# Altium PCB PCB_TRANSCIEVER.PcbDoc (part 2 of 2)
Units mm, origin at the board's own origin, x right, y up, seen from the top; angles counter-clockwise.
Board outline 68.83 x 64.26 mm, 4 copper layers (TOP, GND, 3v3, BOT), stack 1.554 mm thick; 95 components, 64 nets, 336 pads, 537 vias.
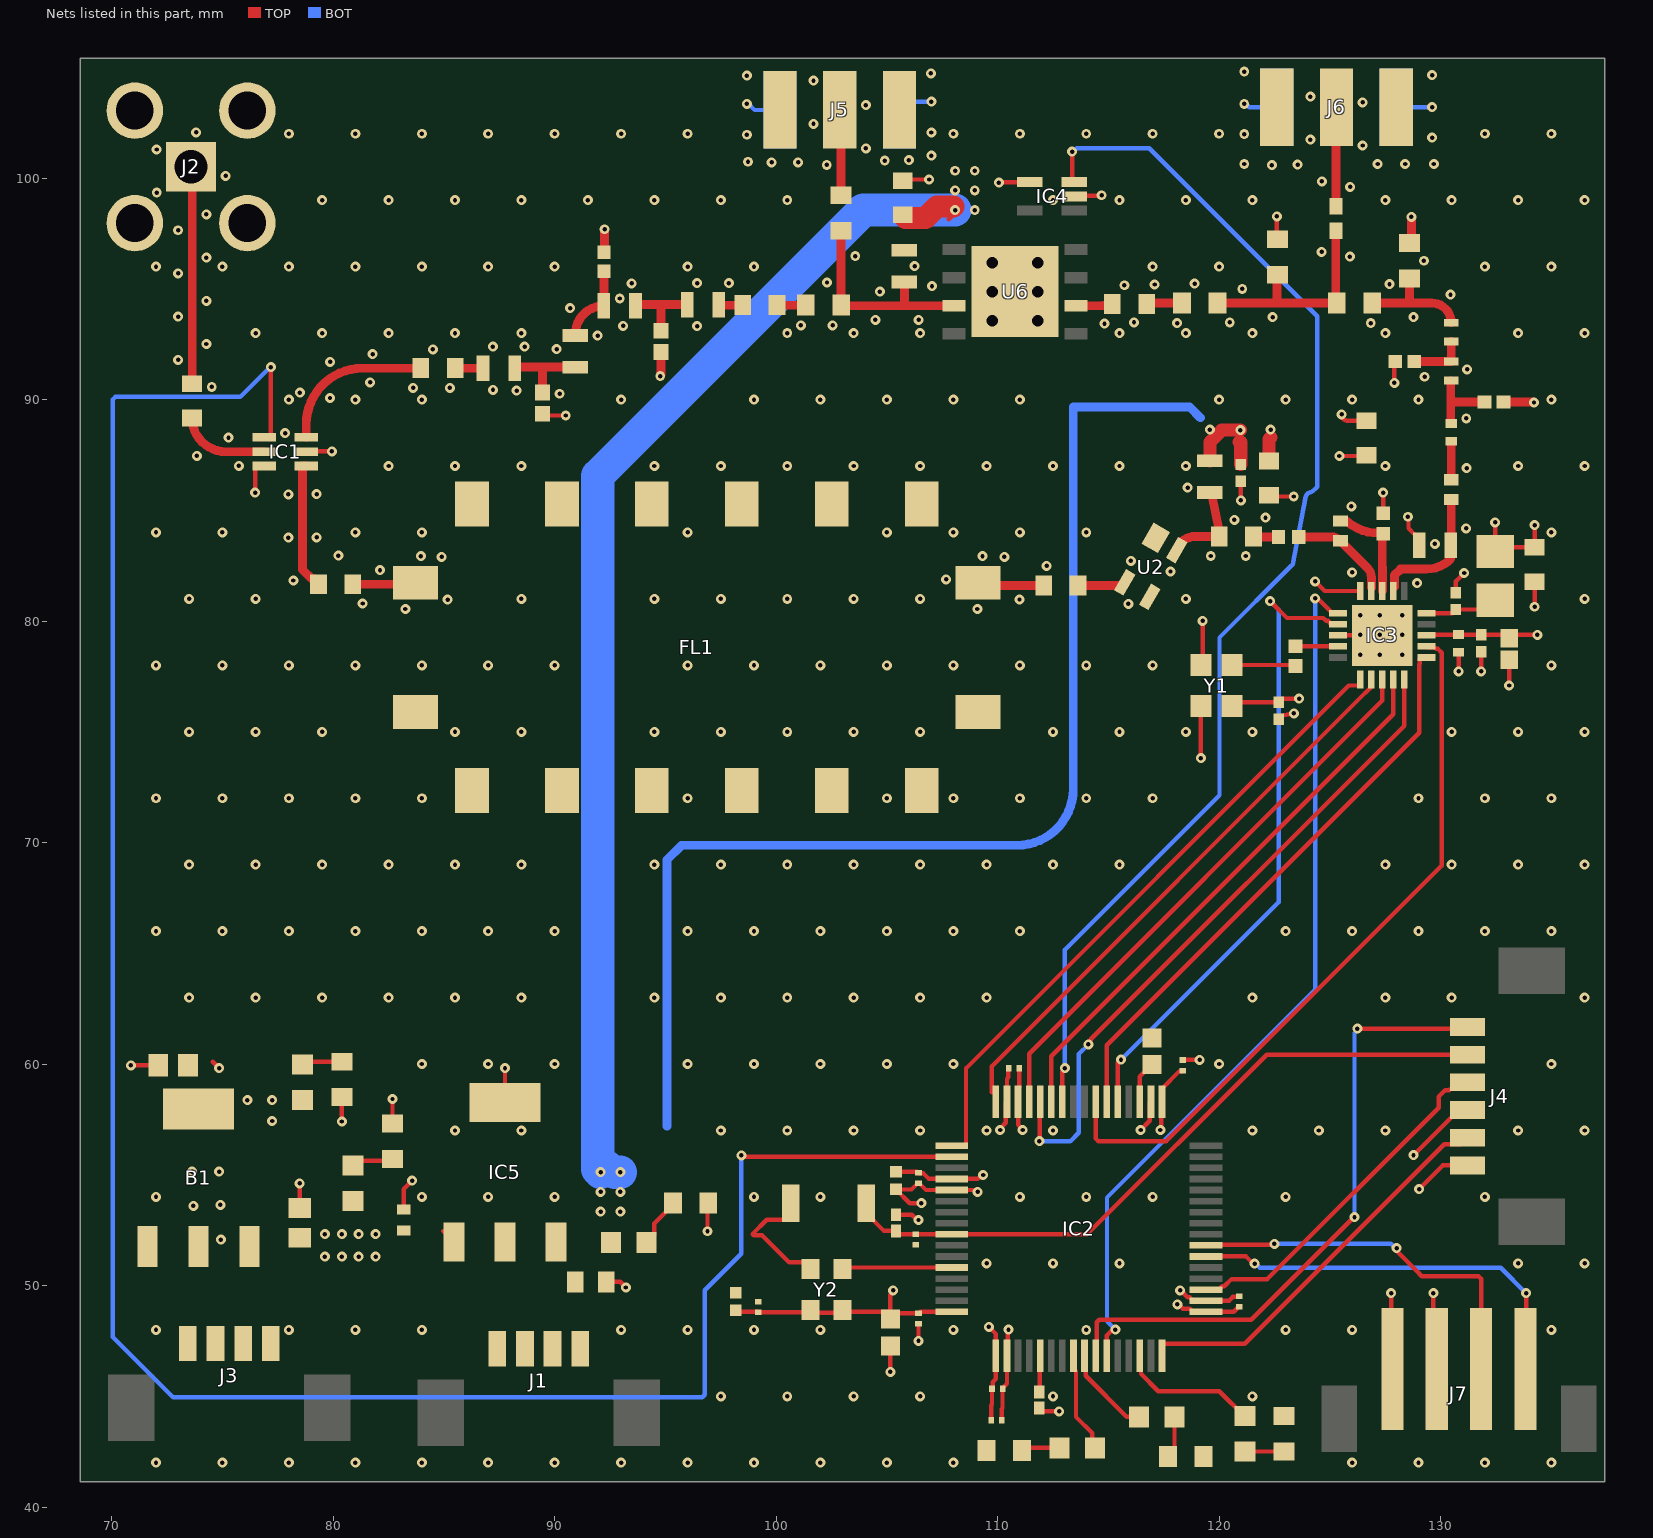
[diagram p4: the nets of this part, all layers, seen from the top]

## Via types
v1: diameter 0.45, hole 0.2, TOP to BOT, 531 vias
v2: diameter 0.81, hole 0.51, TOP to BOT, 6 vias

## Nets (pads, with @x,y where several pads share a name; then routed paths per layer and width w, separated by ;. In a path a pad name is that pad's centre, name@x,y a point inside that pad or via, vN(x,y) a via of type N, cw(c..) or ccw(c..) an arc to the next point about the centre after c; other vN are vias at no path point)
3V3: B1.2 B1.4 C4.1 C6.1 C10.1 C12.2 C13.2 C14.2 C15.2 C16.2 C17.2 C18.1 C19.1 C24.1 C26.1 C27.1 C28.1 C42.1 C44.1 C45.1 IC1.6 IC2.1 IC2.13 IC2.19 IC2.32 IC2.48 IC2.64 IC3.8 IC4.4 J4.1 J7.3 L3.1 LED1.2 R2.2 R4.1 Y1.4 Y2.1 Y2.4 | length 54.7
  TOP w0.2: C42.1@73.406,59.909 C42.1@73.441,59.944 ; 74.565,60.106 v1(74.854,59.817) ; v1(76.479,85.801) 76.479,86.895 76.579,86.995 IC1.6@76.886,86.995 ; C45.1@98.298,48.876 98.364,48.81 99.162,48.81 C44.1@99.187,48.784 101.437,48.784 Y2.1@101.547,48.895 101.674,48.768 102.87,48.768 Y2.4@102.997,48.895 103.084,48.808 105.027,48.808 C18.1@105.156,48.679 ; C18.1@105.156,48.48 C18.1@105.156,48.679 ; C18.1@105.228,48.752 C16.2@106.426,48.752 106.451,48.752 106.512,48.813 IC2.1@107.933,48.813 ; v1(105.283,49.784) 105.283,49.716 105.156,49.589 C18.1@105.156,48.679 ; R2.2@105.41,53.198 106.12,53.198 106.358,52.959 v1(106.426,52.959) ; C10.1@105.41,55.137 106.366,55.137 106.401,55.102 C19.1@106.426,55.102 106.451,55.076 106.632,55.076 106.896,54.813 IC2.13@107.933,54.813 109.101,54.813 109.279,54.991 v1(109.347,54.991) ; v1(109.601,48.133) 109.921,47.813 IC2.64@109.921,46.825 109.921,45.787 109.77,45.635 109.77,45.364 C13.2@109.744,45.339 109.744,44.628 109.719,44.602 C17.2@109.719,43.917 ; v1(110.058,99.797) 110.073,99.812 111.44,99.812 IC4.4@111.455,99.827 ; C14.2@110.982,59.817 110.982,58.948 110.921,58.888 IC2.19@110.921,58.301 110.921,57.263 111.125,57.06 v1(111.125,57.023) ; v1(117.348,57.023) 117.385,57.06 117.385,58.264 IC2.32@117.421,58.301 117.421,58.888 118.215,59.681 118.339,59.681 C15.2@118.364,59.706 ; v1(118.11,49.149) 118.178,49.149 118.365,48.961 118.674,48.961 118.822,48.813 IC2.48@119.409,48.813 120.653,48.813 120.879,49.038 C12.2@120.904,49.038 ; Y1.4@120.588,76.164 120.749,76.325 C4.1@122.682,76.325 122.818,76.482 v1(123.611,76.493) ; v1(125.425,87.452) C6.1@126.492,87.452 ; v1(128.524,84.709) 128.548,84.685 128.548,84.184 128.843,83.889 128.843,83.395 L3.1@129.054,83.185 ; v1(129.032,54.356) 130.098,55.422 J4.1@131.212,55.422 ; IC3.8@129.364,79.356 129.382,79.375 130.791,79.375 C28.1@130.81,79.394 130.821,79.383 131.815,79.383 131.815,79.376 132.949,79.376 C24.1@133.096,79.229 133.242,79.375 v1(134.366,79.375) ; v1@129.667,49.53 129.667,46.387 J7.3@129.826,46.228 ; v1(132.461,84.455) R4.1@132.461,83.142 132.644,83.325 C27.1@134.239,83.325 v1(134.239,84.328)
  other v1: 129.667,49.657 74.93,52.07 73.685,53.594 74.905,53.645 73.635,55.143 74.854,55.143 77.241,57.429 76.124,58.369 77.241,58.369
12V: C1.2 C38.1 IC5.1 J1.1 J1.2 J1.3 J1.4 L8.2 LED2.2 | length 56.9
  TOP w0.2: L8.2@105.374,96.876 L8.2@105.664,96.876 ; C38.1@105.663,98.209 C38.1@106.03,98.576 ; 107.796,98.144 108.077,98.425 v1(108.077,98.552)
  TOP w1: C38.1@105.842,98.196 106.744,98.196 107.265,98.717 v1@108.001,98.717
  BOT w1.5: 92.329,55.372 v1(92.075,55.118) 91.948,55.245 91.948,86.563 103.937,98.552 v1(108.077,98.552) ; 92.71,55.118 v1(92.964,55.118)
  other v1: 92.075,53.34 92.964,53.34 92.075,54.229 92.964,54.229 108.966,98.552 108.077,99.441 108.966,99.441 108.077,100.33 108.966,100.33
+5V: B1.3 C2.1 C8.1 C32.1 C33.1 IC5.3 L13.1 LED3.2 | length 60.6
  TOP w0.2: 84.963,52.462 IC5.3@85.457,51.968
  TOP w0.6: L13.1@119.583,87.231 119.583,88.082 120.121,88.621 v1(120.955,88.621) ; 120.904,88.087 120.975,88.087 120.98,88.082 C32.1@120.98,87.066 ; C33.1@122.25,87.224 122.25,88.214 122.326,88.29
  BOT w0.4: 95.072,57.21 95.072,69.215 95.733,69.875 110.871,69.875 ccw(c110.871,72.415) 113.411,72.415 113.411,89.662 118.669,89.662 119.151,89.179
  other v1: 79.629,51.308 80.391,51.308 81.153,51.308 81.915,51.308 79.629,52.324 80.391,52.324 81.153,52.324 81.915,52.324 119.583,88.646 122.326,88.646
GND: B1.1 C1.1 C2.2 C4.2 C6.2 C8.2 C9.2 C10.2 C11.1 C12.1 C13.1 C14.1 C15.1 C16.1 C17.1 C18.2 C19.2 C21.1 C22.1 C23.1 C24.2 C26.2 C27.2 C28.2 C29.2 C32.2 C33.2 C38.2 C39.1 C40.1 C41.2 C42.2 C44.2 C45.2 FL1.2 FL1.3 FL1.4 FL1.5 FL1.6 FL1.7 FL1.8 FL1.9 FL1.11 FL1.12 FL1.13 FL1.14 FL1.15 FL1.16 IC1.2 IC2.12 IC2.18 IC2.31 IC2.47 IC2.63 IC3.1 IC3.18 IC3.21 IC4.2 IC5.2 IC5.4 J2.2 J2.3 J2.4 J2.5 J3.1 J3.2 J3.3 J3.4 J4.3 J5.G1 J5.G2 J5.G3 J5.G4 J6.G1 J6.G2 J6.G3 J6.G4 J7.4 R3.1 R6.1 R7.2 R9.2 R12.1 R13.1 R14.2 R15.2 R16.2 SW1.1 U2.2 U2.4 U6.9 Y1.1 Y1.2 Y2.2 | length 79.5
  TOP w0.2: v1(70.866,59.944) C42.2@72.101,59.944 ; C2.2@78.486,53.248 C2.2@78.486,53.502 v1(78.486,54.61) ; IC1.2@78.786,87.645 78.804,87.663 v1(79.941,87.663) ; v1(80.391,57.404) R7.2@80.391,58.509 ; R9.2@82.677,57.315 v1(82.677,58.42) ; C8.2@83.185,53.434 83.185,54.356 v1(83.566,54.737) ; IC5.4@87.757,58.268 v1(87.757,59.817) ; C40.1@89.459,89.361 89.539,89.281 v1(90.5,89.281) ; C41.2@92.227,96.644 C41.2@92.24,96.656 ; C1.1@92.329,50.165 92.964,50.165 v1(93.218,49.911) ; v1(94.767,91.059) ccw(c94.706,91.12) v1@94.793,91.12 ; v1(96.901,52.451) 96.901,53.683 R13.1@96.939,53.721 ; SW1.1@100.662,53.721 100.662,53.271 100.362,52.971 99.58,52.971 98.933,52.324 98.981,52.276 99.362,52.276 100.584,51.054 101.247,51.054 101.547,50.754 Y2.2@101.547,50.745 ; v1(105.156,46.101) C18.2@105.156,47.278 ; C38.2@105.715,99.886 105.765,99.936 v1(106.909,99.936) ; v1(106.426,47.498) C16.1@106.426,48.276 ; v1(106.553,53.721) 106.026,53.721 C10.2@105.41,54.337 106.112,54.337 106.401,54.626 C19.2@106.426,54.626 106.451,54.626 106.765,54.313 IC2.12@107.933,54.313 108.942,54.313 109.025,54.229 v1(109.093,54.229) ; v1(110.109,57.023) 110.109,57.091 110.371,57.353 110.371,58.251 IC2.18@110.421,58.301 110.421,59.338 110.481,59.398 110.481,59.792 C14.1@110.506,59.817 ; C17.1@110.194,43.917 110.194,44.425 110.22,44.45 C13.1@110.22,45.339 ; C13.1@110.22,45.364 110.421,45.566 IC2.63@110.421,46.825 110.456,46.859 110.456,47.972 v1(110.49,48.006) ; R3.1@111.887,44.465 111.887,44.459 112.023,44.323 v1(112.776,44.323) ; IC4.2@113.455,99.177 113.478,99.2 114.668,99.2 v1(114.692,99.223) ; v1(116.459,57.023) 116.871,57.435 116.871,58.251 IC2.31@116.921,58.301 ; v1(118.237,49.784) 118.266,49.784 118.588,49.461 118.674,49.461 118.822,49.313 IC2.47@119.409,49.313 120.447,49.313 120.623,49.488 120.879,49.488 C12.1@120.904,49.514 ; C15.1@118.364,60.182 118.372,60.19 v1(119.118,60.19) ; v1(119.177,73.812) v1@119.177,73.838 ; v1@119.177,73.962 119.177,76.153 Y1.1@119.188,76.164 ; Y1.2@119.188,78.014 119.253,78.079 v1(119.253,80.01) ; v1(120.98,85.446) C32.2@120.98,86.309 ; C33.2@122.25,85.674 122.301,85.623 v1(123.368,85.623) ; v1(122.606,98.273) 122.606,97.256 R12.1@122.631,97.231 ; C4.2@122.682,75.567 122.818,75.725 v1(123.376,75.831) ; v1(124.333,81.788) 124.765,81.356 IC3.1@126.364,81.356 ; IC3.18@125.364,79.356 126.346,79.356 v1(126.365,79.375) v1(127.254,79.375) ; v1(125.527,89.332) ccw(c125.819,89.332) 125.819,89.04 C6.2@126.644,89.04 ; C21.1@127.406,84.864 v1@127.406,85.7 ; v1(127.762,49.657) 127.762,46.292 J7.4@127.826,46.228 ; v1(127.914,90.754) 127.914,91.691 C23.1@127.943,91.719 ; R6.1@128.6,97.066 R6.1@128.676,97.142 ; v1(128.676,98.247) 128.676,98.171 v1@128.702,98.146 ; v1(128.774,55.884) 130.812,57.922 J4.3@131.212,57.922 ; C29.2@130.683,81.278 130.683,81.788 v1(131.064,82.169) ; v1(130.81,77.724) C28.2@130.81,78.594 ; v1(131.826,77.724) C26.2@131.826,78.615 ; C22.1@132.839,89.891 C22.1@132.851,89.903 ; v1(133.096,77.089) C24.2@133.096,78.251 ; v1(134.239,80.645) C27.2@134.239,81.775
  TOP w0.4: C41.2@92.24,96.656 92.243,96.66 92.243,97.679 v1(92.253,97.688) ; v1@94.793,91.12 C39.1@94.793,92.151 ; R6.1@128.676,97.142 v1@128.676,98.171 ; C22.1@132.851,89.903 132.864,89.891 134.175,89.891 134.2,89.865 v1(134.214,89.865)
  BOT w0.2: v1(98.679,103.353) 98.747,103.353 99.026,103.073 J5.G4@100.17,103.073 ; J5.G3@105.57,103.073 105.951,103.454 v1(107.01,103.454) ; v1(121.133,103.353) 121.2,103.353 121.353,103.2 J6.G4@122.598,103.2 ; J6.G3@127.998,103.2 v1(129.616,103.2)
  other v1: 72,42 75,42 78,42 81,42 84,42 87,42 90,42 93,42 96,42 99,42 102,42 105,42 108,42 126,42 129,42 132,42 135,42 97.5,45 100.5,45 103.5,45 106.5,45 112.5,45 121.5,45 72,48 78,48 81,48 84,48 93,48 96,48 99,48 102,48 108,48 114,48 123,48 126,48 135,48 109.5,51 112.5,51 115.5,51 133.5,51 136.5,51 72,54 84,54 87,54 90,54 99,54 102,54 111,54 114,54 117,54 123,54 132,54 85.5,57 88.5,57 97.5,57 100.5,57 103.5,57 106.5,57 109.5,57 112.5,57 121.5,57 124.5,57 127.5,57 133.5,57 136.5,57 84,60 87,60 90,60 96,60 99,60 102,60 105,60 108,60 120,60 135,60 73.5,63 76.5,63 79.5,63 82.5,63 85.5,63 88.5,63 94.5,63 97.5,63 100.5,63 103.5,63 106.5,63 109.5,63 121.5,63 127.5,63 130.5,63 136.5,63 72,66 75,66 78,66 81,66 84,66 87,66 90,66 96,66 99,66 102,66 105,66 108,66 111,66 123,66 126,66 129,66 132,66 135,66 73.5,69 76.5,69 79.5,69 82.5,69 85.5,69 88.5,69 94.5,69 97.5,69 100.5,69 103.5,69 106.5,69 109.5,69 112.5,69 115.5,69 127.5,69 130.5,69 133.5,69 136.5,69 72,72 75,72 78,72 81,72 84,72 96,72 105,72 108,72 111,72 114,72 117,72 129,72 132,72 135,72 73.5,75 76.5,75 79.5,75 85.5,75 88.5,75 94.5,75 97.5,75 100.5,75 103.5,75 106.5,75 112.5,75 115.5,75 118.5,75 121.5,75 130.5,75 133.5,75 136.5,75 72,78 75,78 78,78 81,78 84,78 87,78 90,78 96,78 99,78 102,78 105,78 108,78 111,78 114,78 117,78 135,78 126.365,78.486 127.254,78.486 128.27,78.486 128.27,79.375 126.365,80.264 127.254,80.264 128.27,80.264 83.261,80.543 109.084,80.543 115.899,80.773 81.326,80.791 85.164,80.965 110.986,80.973 73.5,81 76.5,81 88.5,81 94.5,81 97.5,81 100.5,81 103.5,81 106.5,81 118.5,81 136.5,81 128.938,81.709 78.207,81.831 107.67,81.885 126,82.198 117.802,82.236 82.114,82.298 112.207,82.494 116.018,82.719 84.899,82.897 110.299,82.897 83.959,82.93 109.317,82.93 119.621,82.938 121.2,82.937 80.239,82.956 129.74,83.487 77.976,83.768 79.25,83.78 72,84 75,84 81,84 84,84 96,84 105,84 108,84 111,84 114,84 135,84 131.148,84.186 120.687,84.571 122.093,84.67 125.972,85.174 77.976,85.718 79.25,85.73 127.406,85.801 118.575,86.026 131.173,86.903 75.745,87.008 82.5,87 85.5,87 88.5,87 94.5,87 97.5,87 100.5,87 103.5,87 106.5,87 109.5,87 112.5,87 115.5,87 118.5,87 127.5,87 133.5,87 136.5,87 73.847,87.453 75.275,88.282 77.827,88.482 131.156,89.153 78,90 81,90 84,90 93,90 99,90 102,90 105,90 108,90 111,90 120,90 123,90 126,90 129,90 135,90 79.856,90.069 90.228,90.262 78.494,90.314 88.284,90.406 87.214,90.44 83.608,90.531 85.267,90.531 74.518,90.572 81.673,90.777 129.275,91.029 131.197,91.359 79.867,91.699 72.997,91.793 81.785,92.052 84.5,92.265 90.089,92.275 87.213,92.39 88.643,92.39 74.272,92.507 91.94,92.887 76.5,93 79.5,93 82.5,93 85.5,93 88.5,93 100.5,93 103.5,93 106.5,93 115.5,93 118.5,93 121.5,93 127.5,93 133.5,93 136.5,93 93.091,93.331 96.435,93.31 101.111,93.351 102.547,93.351 114.824,93.427 118.104,93.453 126.845,93.453 116.154,93.481 120.478,93.483 104.481,93.597 106.431,93.597 122.414,93.724 128.776,93.724 72.997,93.743 90.702,94.126 74.272,94.457 92.938,94.562 130.445,94.732 104.68,94.871 121.042,94.998 107.036,95.123 115.717,95.161 117.086,95.194 127.692,95.209 118.892,95.236 93.478,95.242 96.434,95.26 97.864,95.26 102.296,95.285 72.997,95.693 72,96 75,96 78,96 81,96 84,96 87,96 90,96 96,96 99,96 106.252,96.024 117,96 120,96 132,96 135,96 129.241,96.266 74.272,96.407 125.904,96.453 103.571,96.475 124.629,96.663 72.997,97.643 74.272,98.357 79.5,99 82.5,99 85.5,99 88.5,99 91.5,99 94.5,99 97.5,99 100.5,99 112.5,99 115.5,99 118.5,99 121.5,99 127.5,99 130.5,99 133.5,99 136.5,99 72.034,99.338 125.91,99.605 124.635,99.851 75.142,100.102 102.283,100.594 122.377,100.584 123.546,100.609 121.133,100.635 127.152,100.635 128.397,100.635 129.692,100.635 99.797,100.711 100.99,100.711 98.73,100.736 104.902,100.787 105.994,100.813 107.01,101.016 72.025,101.288 104.053,101.342 126.482,101.469 124.115,101.73 129.616,101.829 98.679,101.956 121.133,101.981 78,102 81,102 84,102 87,102 90,102 93,102 96,102 108,102 111,102 114,102 117,102 120,102 132,102 135,102 73.814,102.066 107.01,102.057 101.687,102.45 104.053,103.292 126.482,103.419 124.115,103.68 101.687,104.4 98.679,104.623 129.616,104.648 106.985,104.724 121.133,104.8
  other v2: 109.755,93.556 111.811,93.556 109.755,94.869 111.811,94.869 109.755,96.182 111.811,96.182
NetC3_1: C3.1 Y1.3 | length 2.9
  TOP w0.2: Y1.3@120.588,78.014 123.397,78.014 C3.1@123.444,77.967
NetC5_1: C5.1 C34.1 | length 1.1
  TOP w0.4: C34.1@121.552,83.82 ccw(c121.577,83.82) 121.577,83.795 C5.1@122.679,83.795
NetC7_1: C7.1 L2.2 | length 1.8
  TOP w0.4: L2.2@130.48,86.378 130.48,88.068 cw(c130.531,88.068) C7.1@130.531,88.119
NetC7_2: C7.2 C22.2 L6.2 | length 3.5
  TOP w0.4: L6.2@130.455,90.838 130.455,89.891 ; C7.2@130.48,88.919 cw(c130.48,88.944) 130.455,88.944 130.455,89.891 ; C22.2@131.982,89.891 130.455,89.891
NetC9_1: C9.1 IC2.30 | length 1.9
  TOP w0.2: IC2.30@116.421,58.301 116.421,59.433 C9.1@116.967,59.978
NetC23_2: C23.2 L6.1 L7.2 | length 2.6
  TOP w0.4: C23.2@128.8,91.719 L6.1@130.48,91.719 ; L7.2@130.48,92.615 L6.1@130.48,91.713 L6.1@130.505,91.738
NetC30_1: C30.1 J2.1 | length 9.8
  TOP w0.4: J2.1@73.533,100.457 cw(c73.533,100.355) 73.635,100.355 C30.1@73.635,90.716
NetC30_2: C30.2 IC1.5 | length 4.1
  TOP w0.4: C30.2@73.635,89.166 ccw(c75.156,89.166) 75.156,87.645 IC1.5@76.886,87.645
NetC31_1: C31.1 IC1.3 | length 7.2
  TOP w0.4: IC1.3@78.786,88.295 78.786,88.875 cw(c81.326,88.875) 81.326,91.415 C31.1@83.959,91.415
NetC31_2: C31.2 L10.1 | length 1.3
  TOP w0.4: C31.2@85.509,91.415 L10.1@86.763,91.415
NetC34_2: C34.2 L13.2 U2.1 | length 4.2
  TOP w0.4: U2.1@118.089,83.205 118.233,83.526 118.271,83.565 118.285,83.578 cw(c118.948,82.788) 118.948,83.82 119.827,83.82 C34.2@120.002,83.82 120.002,84.07 L13.2@119.661,85.717 ; L13.2@119.583,85.801 L13.2@119.662,85.716
NetC35_1: C35.1 FL1.10 | length 3
  TOP w0.4: FL1.10@109.118,81.736 ccw(c109.423,82.04) 109.423,81.61 C35.1@112.077,81.61
NetC35_2: C35.2 U2.3 | length 2.2
  TOP w0.4: C35.2@113.627,81.61 115.424,81.61 ccw(c115.424,82.061) U2.3@115.743,81.742
NetC36_1: C36.1 R11.1 | length 1.7
  TOP w0.4: C36.1@116.726,94.361 118.199,94.361 R11.1@118.326,94.488
NetC36_2: C36.2 U6.2 | length 1.7
  TOP w0.4: U6.2@113.619,94.234 114.78,94.234 114.784,94.238 115.014,94.238 115.189,94.413 C36.2@115.189,94.488
NetC37_1: C37.1 R1.1 | length 1.3
  TOP w0.4: C37.1@100.038,94.259 R1.1@101.333,94.259
NetC37_2: C37.2 L9.1 | length 1.1
  TOP w0.4: L9.1@97.413,94.285 ccw(c97.438,94.285) 97.438,94.259 C37.2@98.488,94.259
NetC39_2: C39.2 L9.2 L11.2 | length 3.6
  TOP w0.4: L11.2@93.65,94.234 cw(c93.701,94.234) 93.701,94.285 94.842,94.285 ; C39.2@94.793,93.108 94.793,94.236 cw(c94.842,94.236) 94.842,94.285 ; L9.2@95.983,94.285 94.842,94.285
NetC40_2: C40.2 L10.2 L12.1 | length 3.9
  TOP w0.4: L10.2@88.193,91.415 cw(c88.24,91.415) 88.24,91.462 89.459,91.462 ; C40.2@89.459,90.318 89.459,91.462 ; L12.1@90.932,91.462 89.459,91.462
NetC41_1: C41.1 L11.1 L12.2 | length 3.6
  TOP w0.4: L12.2@90.932,92.892 90.932,92.946 cw(c92.22,92.946) L11.1@92.22,94.234 92.227,94.234 C41.1@92.227,95.787
NetC46_1: C46.1 IC1.1 | length 5.9
  TOP w0.4: IC1.1@78.786,86.995 78.613,86.995 78.613,82.327 79.029,81.911 79.162,81.911 79.337,81.736 C46.1@79.337,81.661
NetC46_2: C46.2 FL1.1 | length 2.9
  TOP w0.4: C46.2@80.887,81.661 83.643,81.661 ccw(c83.643,81.736) FL1.1@83.718,81.736
NetIC2_23: IC2.23 IC4.3 | length 55.8
  TOP w0.2: IC2.23@112.921,58.301 112.921,59.641 113.03,59.749 v1(113.03,59.817) ; v1(113.36,101.194) 113.36,99.922 IC4.3@113.455,99.827
  BOT w0.2: v1(113.03,59.817) 113.03,65.151 120.015,72.136 120.015,79.252 123.258,82.496 123.317,82.554 123.917,85.63 cw(c124.114,85.591) 123.972,85.733 124.005,85.766 ccw(c123.749,86.589) 124.43,86.06 124.43,93.756 116.84,101.346 113.58,101.346 113.428,101.194 v1(113.36,101.194)
NetIC2_26: IC2.26 IC3.9 | length 32.9
  TOP w0.2: IC2.26@114.421,58.301 114.421,56.638 114.539,56.521 117.608,56.521 130.048,68.961 130.048,78.571 129.879,78.74 129.794,78.74 129.728,78.806 129.414,78.806 IC3.9@129.364,78.856
NetIC2_27: IC2.27 IC3.10 | length 26.2
  TOP w0.2: IC2.27@114.921,58.301 114.921,60.845 129.032,74.955 129.032,78.052 129.064,78.084 129.064,78.306 129.114,78.356 IC3.10@129.364,78.356
NetIC2_28: IC2.28 IC3.19 | length 29.4
  TOP w0.2: IC2.28@115.421,58.301 115.421,60.049 v1(115.57,60.198) ; v1(122.301,80.899) 123.063,80.137 124.705,80.137 124.838,80.005 124.923,80.005 125.021,79.906 125.314,79.906 IC3.19@125.364,79.856
  BOT w0.2: v1(115.57,60.198) 122.682,67.31 122.682,80.518 v1(122.301,80.899) v1@122.301,81.026
NetIC2_54: IC2.54 IC3.20 | length 39.7
  TOP w0.2: IC2.54@114.921,46.825 114.928,46.832 114.928,47.745 115.141,47.958 115.268,47.958 v1(115.316,48.006) ; v1@124.46,81.026 124.46,81.01 125.114,80.356 IC3.20@125.364,80.356
  BOT w0.2: v1(115.316,48.006) 114.938,48.384 114.938,48.511 114.935,48.514 114.935,53.971 124.333,63.369 v1(124.333,81.026)
NetIC2_60: IC2.60 R3.2 | length 1.6
  TOP w0.2: R3.2@111.887,45.197 111.904,45.214 111.904,46.808 IC2.60@111.921,46.825
NetL7_1: L7.1 R5.2 R6.2 | length 5.2
  TOP w0.4: R5.2@126.911,94.361 128.651,94.361 ; R6.2@128.6,95.466 128.6,94.412 ccw(c128.651,94.412) 128.651,94.361 ; L7.1@130.48,93.465 ccw(c129.584,93.465) 129.584,94.361 128.651,94.361
NetL8_1: L8.1 R1.2 R8.2 U6.7 | length 9.6
  TOP w0.4: R8.2@102.997,97.625 ccw(c102.997,97.561) 102.933,97.561 R1.2@102.933,94.259 ccw(c102.959,94.259) 102.959,94.234 105.791,94.234 ; L8.1@105.791,95.306 105.791,94.234 ; U6.7@108.028,94.234 105.791,94.234
NetLED1_1: LED1.1 R7.1 | length 1.8
  TOP w0.2: LED1.1@78.613,59.982 78.74,60.109 R7.1@80.391,60.109
NetLED2_1: LED2.1 R13.2 | length 2.3
  TOP w0.2: LED2.1@94.145,51.943 94.495,52.293 94.495,52.802 95.339,53.646 R13.2@95.339,53.721
NetLED3_1: LED3.1 R9.1 | length 1.9
  TOP w0.2: LED3.1@80.899,55.41 81.115,55.626 82.588,55.626 R9.1@82.677,55.715
NetLED4_1: LED4.1 R14.1 | length 1.9
  TOP w0.2: R14.1@117.691,42.291 117.983,42.583 LED4.1@117.983,44.069
NetLED5_1: LED5.1 R15.1 | length 1.8
  TOP w0.2: R15.1@111.1,42.545 111.227,42.672 LED5.1@112.801,42.672
NetLED6_1: LED6.1 R16.1 | length 2
  TOP w0.2: LED6.1@121.158,42.507 R16.1@123.19,42.507
NetR5_1: R5.1 R10.2 R11.2 R12.2 | length 9.9
  TOP w0.4: R11.2@119.926,94.361 122.618,94.361 ; R12.2@122.631,95.631 122.618,95.618 122.618,94.361 ; R10.2@125.266,97.577 125.266,94.406 ccw(c125.311,94.406) R5.1@125.311,94.361 122.618,94.361
NIRQ: IC2.21 IC3.11 | length 30.3
  TOP w0.2: v1(111.887,56.515) 111.904,56.532 111.904,58.284 IC2.21@111.921,58.301 ; v1(114.097,60.884) 114.097,60.951 114.205,61.059 114.205,61.119 128.364,75.278 IC3.11@128.364,77.356
  BOT w0.2: v1(111.887,56.515) 113.284,56.515 113.665,56.896 113.665,60.452 v1(114.097,60.884)
NRST: C11.2 IC2.8 J4.5 R2.1 SW1.2 | length 31.3
  TOP w0.2: SW1.2@104.062,53.721 104.062,53.271 104.867,52.466 R2.1@105.41,52.466 105.41,52.444 105.546,52.308 C11.2@106.299,52.308 ; C11.2@106.368,52.313 IC2.8@107.933,52.313 114.035,52.313 122.144,60.422 J4.5@131.212,60.422
NSEL: IC2.16 IC3.15 | length 29.3
  TOP w0.2: IC2.16@107.933,56.313 108.521,56.313 108.571,56.363 108.571,59.803 125.857,77.089 126.314,77.089 126.364,77.139 IC3.15@126.364,77.356
OSC_IN: IC2.5 Y2.3 | length 5
  TOP w0.2: Y2.3@102.997,50.745 103.065,50.813 IC2.5@107.933,50.813
OSC_OUT: C3.2 IC3.17 | length 1.9
  TOP w0.2: C3.2@123.444,78.867 123.455,78.856 IC3.17@125.364,78.856
RF_SW: IC1.4 IC2.15 | length 102.2
  TOP w0.2: IC1.4@76.886,88.295 77.091,88.295 77.191,88.395 v1(77.191,91.465) ; v1@98.619,55.813 IC2.15@107.933,55.813
  BOT w0.2: v1(77.191,91.465) 77.153,91.465 75.807,90.119 70.17,90.119 70.053,90.002 70.053,47.676 72.771,44.958 96.657,44.958 96.774,45.075 96.774,49.788 98.425,51.439 v1(98.425,55.88)
RX_LED: IC2.57 LED5.2 | length 4.6
  TOP w0.2: IC2.57@113.421,46.825 113.471,46.775 113.471,46.187 113.538,46.121 113.538,44.069 114.277,43.33 114.277,42.796 LED5.2@114.402,42.672
RX_N: C21.2 IC3.3 L1.2 | length 4.7
  TOP w0.4: L1.2@125.476,84.524 125.606,84.537 cw(c125.582,84.138) 125.833,84.45 ccw(c127.19,86.128) 127.19,83.97 127.296,83.97 C21.2@127.406,83.86 ; IC3.3@127.364,81.356 127.372,81.365 127.372,82.43 127.364,82.439 127.364,83.901 C21.2@127.406,83.944
RX_P: C5.2 IC3.2 L1.1 | length 4.6
  TOP w0.4: C5.2@123.599,83.795 125.064,83.795 cw(c125.064,83.212) L1.1@125.476,83.624 126.695,82.405 126.695,82.398 cw(c126.272,81.974) 126.871,81.974 IC3.2@126.871,81.509
SCLK: IC2.22 IC3.12 | length 25.5
  TOP w0.2: IC2.22@112.421,58.301 112.421,60.351 127.864,75.794 IC3.12@127.864,77.356
SDI: IC2.17 IC3.14 | length 26.3
  TOP w0.2: IC2.17@109.921,58.301 109.921,58.685 109.871,58.735 109.728,58.735 109.728,59.893 126.59,76.755 126.597,76.755 126.814,76.971 126.814,77.306 IC3.14@126.864,77.356
SDO: IC2.20 IC3.13 | length 25.7
  TOP w0.2: IC2.20@111.421,58.301 111.421,60.469 127.364,76.411 IC3.13@127.364,77.356
SI_TEST: J6.1 R10.1 | length 4.5
  TOP w0.4: R10.1@125.273,98.721 125.273,103.175 J6.1@125.298,103.2
SMA_PA_OUT: J5.1 R8.1 | length 3.7
  TOP w0.4: J5.1@102.87,102.895 102.921,102.845 R8.1@102.921,99.225
STATUS_LED: IC2.51 LED6.2 | length 6.3
  TOP w0.2: IC2.51@116.421,46.825 116.471,46.775 116.471,46.012 117.253,45.23 120.01,45.23 121.133,44.107 LED6.2@121.158,44.107
SWCLK: IC2.49 J4.2 | length 18.2
  TOP w0.2: IC2.49@117.421,46.825 117.421,47.321 117.471,47.371 121.158,47.371 130.16,56.373 130.913,56.373 J4.2@131.212,56.672
SWDIO: IC2.46 J4.4 | length 16
  TOP w0.2: IC2.46@119.409,49.813 119.997,49.813 120.145,49.961 120.23,49.961 120.561,50.292 122.174,50.292 129.909,58.027 129.909,58.53 130.204,58.825 130.395,58.825 130.442,58.872 130.912,58.872 J4.4@131.212,59.172
SWO: IC2.55 J4.6 | length 28.7
  TOP w0.2: IC2.55@114.421,46.825 114.471,46.875 114.471,48.341 114.589,48.458 121.443,48.458 126.071,53.086 v1(126.111,53.086) ; v1(126.238,61.595) 131.135,61.595 J4.6@131.212,61.672
  BOT w0.2: v1(126.111,53.086) 126.111,61.4 126.238,61.527 v1(126.238,61.595)
TX: IC3.4 L2.1 L3.2 | length 5.5
  TOP w0.4: IC3.4@127.912,81.556 127.912,82.065 128.194,82.347 129.349,82.347 129.351,82.347 ccw(c129.351,83.908) 130.32,82.684 130.337,82.702 130.454,82.819 L3.2@130.454,83.016 ; L3.2@130.48,83.435 L2.1@130.48,85.478
TX_LED: IC2.56 LED4.2 | length 4.3
  TOP w0.2: IC2.56@113.921,46.825 113.971,46.775 113.971,45.922 115.824,44.069 LED4.2@116.548,44.069
USART_RX: IC2.43 J7.1 | length 18.6
  TOP w0.2: IC2.43@119.409,51.313 121.213,51.313 121.533,50.993 v1(121.6,50.993) ; J7.1@133.826,46.228 133.858,46.26 v1(133.858,49.657)
  BOT w0.2: v1(121.6,50.993) 121.65,50.993 121.843,50.8 132.715,50.8 v1(133.858,49.657)
USART_TX: IC2.42 J7.2 | length 17.1
  TOP w0.2: IC2.42@119.409,51.813 119.444,51.847 122.455,51.847 v1(122.489,51.882) ; v1@128.016,51.562 129.032,50.546 129.032,50.536 129.149,50.419 131.709,50.419 131.826,50.302 J7.2@131.826,46.228
  BOT w0.2: v1(122.489,51.882) 127.756,51.882 127.948,51.689 v1(128.016,51.689)
VDD_SI1: C29.1 IC3.6 R4.2 | length 3.4
  TOP w0.2: IC3.6@129.364,80.356 130.54,80.356 130.683,80.499 C29.1@130.683,80.52 132.039,80.52 R4.2@132.461,80.942
pads on no net: IC2.2 IC2.3 IC2.4 IC2.6 IC2.7 IC2.9 IC2.10 IC2.11 IC2.14 IC2.24 IC2.25 IC2.29 IC2.33 IC2.34 IC2.35 IC2.36 IC2.37 IC2.38 IC2.39 IC2.40 IC2.41 IC2.44 IC2.45 IC2.50 IC2.52 IC2.53 IC2.58 IC2.59 IC2.61 IC2.62 IC3.5 IC3.7 IC3.16 IC4.1 IC4.5 J1.MP1 J1.MP2 J3.MP1 J3.MP2 J4.MP1 J4.MP2 J7.5 J7.6 U6.1 U6.3 U6.4 U6.5 U6.6 U6.8

## Polygon pours and split planes (outlines as drawn)
GND on GND "GND" (solid, remove dead copper, pour order 0): 66.04,105.48 66.04,40.536 141.428,40.536 141.428,105.64
GND on TOP "GND" (solid, remove dead copper, pour order 4): 60.427,107.442 61.112,106.756 141.453,106.756 160.02,88.189 143.535,71.704 143.535,38.506 58.42,38.506 57.099,37.186
3V3 on 3v3 "3V3_PLANE" (solid, remove dead copper, shelved, pour order 2): 66.04,105.64 141.341,105.64 141.341,41.031 141.478,40.894 66.04,40.894

## Other copper
TOP:
  drawing of 41 lines, arcs and shapes, not listed
BOT:
  rectangle net +5V: 118.99,87.699 122.825,89.426
  rectangle net +5V: 79.121,50.673 82.423,52.832
  rectangle net +5V: 82.22,50.698 95.58,52.095
  rectangle net 12V: 107.696,98.044 109.347,100.838
  rectangle net 12V: 91.44,52.578 93.599,55.626
  rectangle net +5V: 94.539,50.698 95.631,57.937

## Silkscreen, mask and mechanical layers (free items; w line width, h text height)
Top Overlay:
  text "CalgaryToSpace" at 91.64,69.021 h0.8
  text "UHF Transciever Rev 1.0" at 91.618,67.742 h1
Top Solder:
  lines w0.254: 85.234,91.415 86.603,91.415 ; 97.464,94.259 98.388,94.259 ; 99.814,94.31 101.016,94.31 ; 118.285,83.578 118.376,83.578 ; 125.806,83.363 125.806,83.285 ; 126.871,81.741 126.871,82.047 ; 128.549,94.285 128.6,94.336 ; 125.806,83.285 125.806,83.294 125.806,83.285 ; 126.87,82.047 126.871,82.047 ; 125.776,84.409 125.801,84.409 125.776,84.409
  lines w0.4: 113.619,94.234 114.78,94.234 ; 113.907,94.234 113.911,94.238 ; 114.899,94.238 115.014,94.238 ; 116.502,94.361 117.907,94.361 ; 127.912,81.556 127.912,82.065 128.194,82.347 129.21,82.347 ccw(c129.396,83.583) 130.454,82.917
  lines w0.5: 73.635,90.816 73.635,99.949 ; 73.736,88.849 ccw(c75.063,88.957) 75.171,87.63 76.352,87.63 ; 78.638,86.792 78.638,82.352 79.237,81.754 ; 78.731,88.666 cw(c82.129,88.401) 79.934,91.008 ; 80.048,91.029 cw(c82.615,83.759) 83.824,91.374 ; 81.178,81.661 82.829,81.661 ; 88.16,91.462 90.387,91.462 ; 89.459,90.576 89.459,91.462 ; 91.008,93.123 91.008,93.523 91.567,94.082 91.973,94.082 ; 92.227,94.779 92.227,95.715 ; 93.624,94.285 95.823,94.285 ; 94.793,93.269 94.793,94.236 ; 102.921,99.619 102.921,101.676 ; 102.933,94.659 102.933,97.396 ; 102.984,94.234 107.659,94.234 ; 105.791,94.234 105.791,95.146 ; 110.134,81.585 111.785,81.585 ; 113.894,81.585 115.399,81.585 ; 118.376,83.578 118.618,83.82 119.902,83.82 ; 120.167,94.361 124.866,94.361 ; 121.793,83.82 122.377,83.82 ; 122.606,94.374 122.606,95.199 ; 123.85,83.795 125.171,83.795 ; 125.273,94.869 125.273,97.434 ; 125.273,99.162 125.273,101.625 ; 125.776,84.488 ccw(c127.555,86.909) 127.051,83.947 ; 125.806,83.285 126.87,82.221 126.87,82.047 ; 127.229,94.31 128.575,94.31 ; 127.381,81.763 127.381,83.668 ; 128.549,94.285 129.892,94.285 ; 128.6,94.336 128.6,95.199
  lines w0.7: 129.354,91.719 130.007,91.745 ; 129.892,94.285 130.471,93.706 130.471,93.59 ; 130.394,89.891 131.863,89.891 ; 130.454,89.117 130.454,90.586 ; 130.48,83.959 130.48,85.428 ; 130.48,86.5 130.48,87.97 ; 130.48,92.54 130.505,91.887
Mechanical 1:
  the board outline again, w0.254